# EAGLE board Computer Power Relay - Controller (EAGLE 9.6.2)
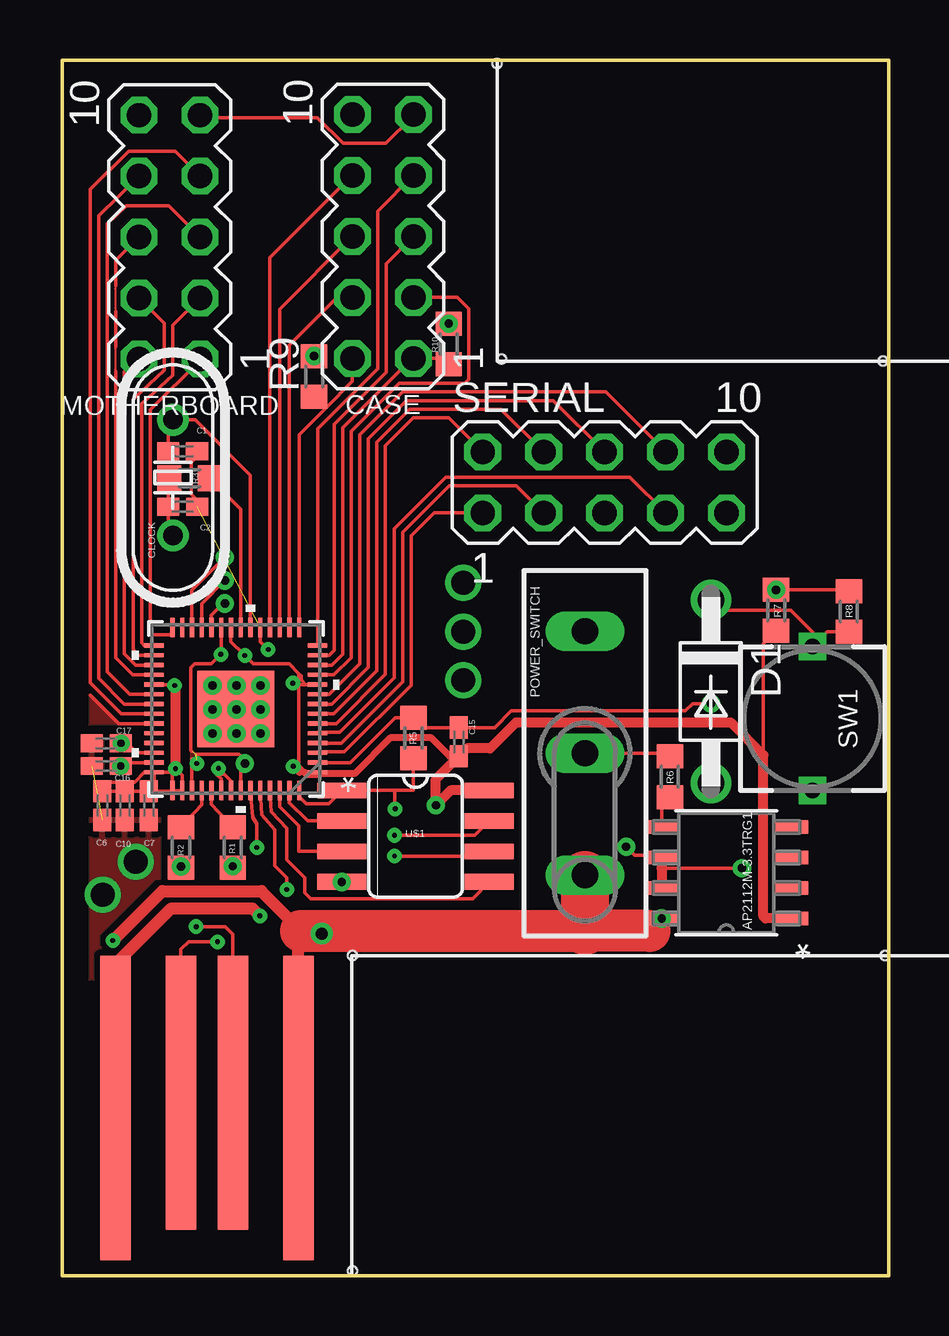
[diagram p0: board, top side]
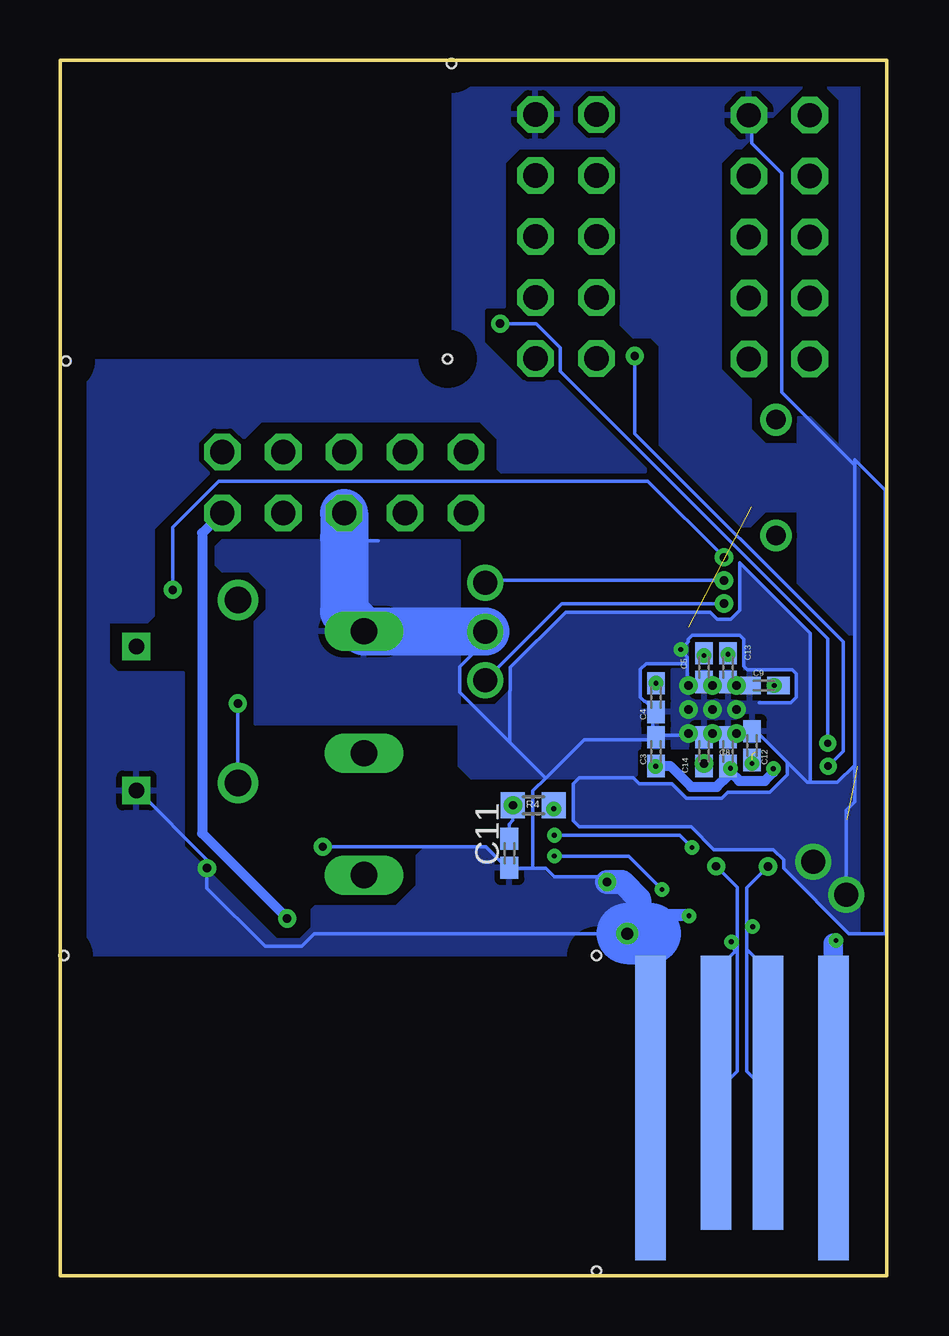
[diagram p1: board, bottom side, seen from below]

Size 34.45 x 50.65 mm. Coordinates in mm from the lower left corner, seen from the top.
Outline: 0,0 12.06,0 34.45,0 34.45,50.65 0,50.65 0,0
Copper layers (1*16): Top 0.035mm / dielectric 1.5mm / Bottom 0.035mm
Design rules "default": minimum track width 6mil, minimum drill 0.35mm, track to track 6mil, track to pad 6mil, pad to pad 6mil, via to via 6mil, smd to smd 6mil, copper to edge 40mil, drill to drill 6mil, minimum pad ring 10mil, minimum via ring 8mil, stop-mask expansion 4mil, vias tented up to drill 0mil, thermal gap 10mil
Net classes: 0 default: clearance 0.205 mm
Holes 0.38 mm at 18.3,38.2 18.13,50.5 34.2,38.1 34.29,13.34 12.1,13.34 12.1,0.2

## Footprints (pad centres in the part's own frame; a part is rotated, then mirrored left to right if it is on the bottom)
C0402K = smd 0.925 x 0.74: 1 -0.6,0; 2 0.6,0
MA05-2 = drill 1.016 octagon: 1 -5.08,-1.27; 2 -5.08,1.27; 3 -2.54,-1.27; 4 -2.54,1.27; 5 0,-1.27; 6 0,1.27; 7 2.54,-1.27; 8 2.54,1.27; 9 5.08,-1.27; 10 5.08,1.27
HC49/S = drill 0.813: 1 -2.413,0; 2 2.413,0
DO41-10 = drill 1.118: A 3.81,0; C -3.81,0
SWITCH-SLIDE-2P2T = drill 1.1 pad 1.422 long: 1 -5.08,0; 2 0,0; 3 5.08,0
R0603 = smd 1 x 1.1: 1 -0.85,0; 2 0.85,0
PUSHBUTTON_TH = drill 0.65 square: P$1 3,0; P$2 -3,0
IC57_RP2040 = smd 0.813 x 0.178: 1 -3.404,2.642; 2 -3.404,2.235; 3 -3.404,1.829; 4 -3.404,1.422; 5 -3.404,1.016; 6 -3.404,0.61; 7 -3.404,0.203; 8 -3.404,-0.203; 9 -3.404,-0.61; 10 -3.404,-1.016; 11 -3.404,-1.422; 12 -3.404,-1.829; 13 -3.404,-2.235; 14 -3.404,-2.642; 29 3.404,-2.642; 30 3.404,-2.235; 31 3.404,-1.829; 32 3.404,-1.422; 33 3.404,-1.016; 34 3.404,-0.61; 35 3.404,-0.203; 36 3.404,0.203; 37 3.404,0.61; 38 3.404,1.016; 39 3.404,1.422; 40 3.404,1.829; 41 3.404,2.235; 42 3.404,2.642 | smd 0.178 x 0.813: 15 -2.642,-3.404; 16 -2.235,-3.404; 17 -1.829,-3.404; 18 -1.422,-3.404; 19 -1.016,-3.404; 20 -0.61,-3.404; 21 -0.203,-3.404; 22 0.203,-3.404; 23 0.61,-3.404; 24 1.016,-3.404; 25 1.422,-3.404; 26 1.829,-3.404; 27 2.235,-3.404; 28 2.642,-3.404; 43 2.642,3.404; 44 2.235,3.404; 45 1.829,3.404; 46 1.422,3.404; 47 1.016,3.404; 48 0.61,3.404; 49 0.203,3.404; 50 -0.203,3.404; 51 -0.61,3.404; 52 -1.016,3.404; 53 -1.422,3.404; 54 -1.829,3.404; 55 -2.235,3.404; 56 -2.642,3.404 | smd 3.2 x 3.2: 57 0,0
AP2112M-3.3TRG1_DIO = smd 1.422 x 0.559: 1 -2.692,1.905; 2 -2.692,0.635; 3 -2.692,-0.635; 4 -2.692,-1.905; 5 2.692,-1.905; 6 2.692,-0.635; 7 2.692,0.635; 8 2.692,1.905
SO08 = smd 0.66 x 2.032: 1 -1.905,-3.073; 2 -0.635,-3.073; 3 0.635,-3.073; 4 1.905,-3.073; 5 1.905,3.073; 6 0.635,3.073; 7 -0.635,3.073; 8 -1.905,3.073
PCB_USB = smd 1.27 x 12.7: 5V -3.81,6.35; GND 3.81,6.35 | smd 1.27 x 12.7 bottom: 5V_2 3.81,6.35; GND_2 -3.81,6.35 | smd 1.27 x 11.43: D+ 1.079,5.715; D- -1.079,5.715 | smd 1.27 x 11.43 bottom: D+_2 -1.079,5.715; D-_2 1.079,5.715

## Placement (x,y rotation side)
C1  ~30pF  [C0402K]  5.03,34.35 180 top
C2  ~30pF  [C0402K]  5.03,32.03 180 top
C3  100nF  [C0402K]  9.62,21.84 270 bottom
C4  100nF  [C0402K]  9.62,24.09 90 bottom
C5  100nF  [C0402K]  7.62,25.34 90 bottom
C6  100nF  [C0402K]  1.68,19.59 90 top
C7  1uF  [C0402K]  3.62,19.59 90 top
C8  100nF  [C0402K]  6.62,21.84 270 bottom
C9  100nF  [C0402K]  5.12,24.59 0 bottom
C10  100nF  [C0402K]  2.62,19.59 90 top
C11  100nF  [C0402K]  15.73,17.6 90 bottom
C12  1uF  [C0402K]  5.62,22.09 270 bottom
C13  100nF  [C0402K]  6.62,25.34 90 bottom
C14  100nF  [C0402K]  7.62,21.84 270 bottom
C15  100nF  [C0402K]  16.53,22.24 270 top
C16  100nF  [C0402K]  1.84,21.23 180 top
C17  100nF  [C0402K]  1.84,22.18 180 top
CASE  [MA05-2]  13.37,43.3 90 top
CLOCK  12MHz  [HC49/S]  4.62,33.25 270 top
D1  1N4004  [DO41-10]  27.03,24.34 270 top
MOTHERBOARD  [MA05-2]  4.48,43.27 90 top
POWER_SWITCH  SWITCH-SLIDE-2P2T  [SWITCH-SLIDE-2P2T]  21.79,21.77 90 top
R1  27.4 Ω  [R0603]  7.11,17.84 270 top
R2  27.4 Ω  [R0603]  4.95,17.84 270 top
R3  1k Ω  [R0603]  5.31,33.23 0 top
R4  10k Ω  [R0603]  14.73,19.6 180 bottom
R5  1k Ω  [R0603]  14.64,22.4 90 top
R6  10k Ω  [R0603]  25.33,20.78 270 top
R7  10k Ω  [R0603]  29.75,27.72 270 top
R8  4.7k Ω  [R0603]  32.79,27.67 90 top
R9  27.4 Ω  [R0603]  10.5,37.47 90 top
R10  27.4 Ω  [R0603]  16.11,38.82 90 top
SERIAL  [MA05-2]  22.61,33.05 0 top
SW1  [PUSHBUTTON_TH]  31.27,23.21 90 top
U1  RP2040  [IC57_RP2040]  7.24,23.61 180 top
U2  AP2112M-3.3TRG1  [AP2112M-3.3TRG1_DIO]  27.68,16.78 180 top
U$1  W25Q128JVSIM-ND__QSPI-FLASH  [SO08]  14.73,18.31 270 top
U$2  PCB_USB  [PCB_USB]  6.03,13.34 180 top

## Library data of the parts
C1-C17 = adafruit
CASE MOTHERBOARD SERIAL = con-lstb; OC_FARNELL: unknown; OC_NEWARK: unknown
CLOCK = crystal; OC_FARNELL: 1667008; OC_NEWARK: unknown
D1 SW1 U$1 U$2 = KVM Keyboard
POWER_SWITCH = Inventory
R1-R10 = rcl; SPICEPREFIX: R
U1 = KVM Keyboard; COPYRIGHT: Copyright (C) 2022 Ultra Librarian. All rights reserved.; DIGI-KEY_PART_NUMBER_1: 2648-SC0908(7)TR-ND; DIGI-KEY_PART_NUMBER_2: 2648-SC0908(7)CT-ND; DIGI-KEY_PART_NUMBER_3: 2648-SC0908(7)DKR-ND; MANUFACTURER_PART_NUMBER: SC0908(7); MFR_NAME: Raspberry Pi
U2 = KVM Keyboard; COPYRIGHT: Copyright (C) 2022 Ultra Librarian. All rights reserved.; DIGI-KEY_PART_NUMBER_1: AP2112M-3.3TRG1DITR-ND; DIGI-KEY_PART_NUMBER_2: AP2112M-3.3TRG1DICT-ND; DIGI-KEY_PART_NUMBER_3: AP2112M-3.3TRG1DIDKR-ND; MANUFACTURER_PART_NUMBER: AP2112M-3.3TRG1; MFR_NAME: Diodes Inc

## Nets
1V1: C12.2 C13.2 C14.2 U1.23 U1.45 U1.50
3V3: C3.2 C4.2 C5.2 C6.2 C7.2 C8.2 C9.2 C10.2 C11.2 C15.2 R4.2 R7.2 U1.1 U1.10 U1.22 U1.33 U1.42 U1.43 U1.44 U1.48 U1.49 U2.1 U$1.8
5V: POWER_SWITCH.1 SERIAL.9 U2.8 U$2.5V U$2.5V_2
BOOTSEL: C15.1 D1.A R5.2 U1.2
BUTTON: D1.C R8.1 SW1.P$1
CASE-1: CASE.1 R10.1 U1.12
CASE-2: CASE.2 R9.1 U1.15
CASE-3: CASE.3 U1.11
CASE-4: CASE.4 U1.16
CASE-5: CASE.5 U1.13
CASE-6: CASE.6 U1.17
CASE-7: CASE.7 U1.14
CASE-8: CASE.8 U1.18
CTS: SERIAL.8 U1.9
D+: R1.2 U$2.D+ U$2.D+_2
D-: R2.2 U$2.D- U$2.D-_2
DBG-CLK: U1.24
DBG-DIO: U1.25
DCD: SERIAL.1 U1.3
DSR: SERIAL.6 U1.8
EN: R6.2 U2.5
GND: C1.1 C2.1 C3.1 C4.1 C5.1 C6.1 C7.1 C8.1 C9.1 C10.1 C11.1 C12.1 C13.1 C14.1 C16.2 C17.2 CASE.9 MOTHERBOARD.9 POWER_SWITCH.3 SERIAL.5 SW1.P$2 U1.19 U1.57 U2.6 U2.7 U$1.4 U$2.GND U$2.GND_2
GPIO16: U1.27
GPIO25: U1.37
GPIO26: U1.38
GPIO27: U1.39
MB-1: MOTHERBOARD.1 U1.28
MB-2: MOTHERBOARD.2 U1.31
MB-3: MOTHERBOARD.3 U1.29
MB-4: MOTHERBOARD.4 U1.30
MB-5: MOTHERBOARD.5 U1.34
MB-6: MOTHERBOARD.6 U1.32
MB-7: MOTHERBOARD.7 U1.36
MB-8: MOTHERBOARD.8 U1.35
N$1: R1.1 U1.47
N$2: R2.1 U1.46
N$3: C2.2 CLOCK.2 R3.1
N$4: R3.2 U1.21
N$5: C1.2 CLOCK.1 U1.20
N$16: U1.54 U$1.3
N$17: U1.55 U$1.2
N$18: U1.53 U$1.5
N$19: U1.52 U$1.6
N$20: U1.51 U$1.7
PWM0: C17.1 R10.2 U1.40
PWM1: C16.1 R9.2 U1.41
QSPI_SS_N: R4.1 R5.1 U1.56 U$1.1
RTS: SERIAL.7 U1.5
RUN: R7.1 R8.2 U1.26
RXD: SERIAL.2 U1.6
SE4: SERIAL.4 U1.7
SWITCH: POWER_SWITCH.2 R6.1
TXD: SERIAL.3 U1.4

## Tracks (layer width: path | path; a pad name or v marks a point on that pad's centre or on a via)
1V1  (via drill 0.2, 0.35)  (2 unrouted)
  Top 0.152: U1.50 7.44,21.16 | 7.44,21.16 7.44,21.65 7.37,21.73 5.6,21.73 | 5.41,21.84 5.36,21.89 5.36,25.33 5.52,25.49 6.22,25.49 v6.62,25.89 C13.2 U1.23 6.62,27.03 | 5.37,20.17 U1.45 5.41,21.54 v5.62,21.34 | v7.62,21.34 7.44,21.16
  Bottom 0.152: C14.2 v7.62,21.34 | C12.2 v5.62,21.34 | C13.2 6.7,25.91 v6.62,25.89
  pour Top: 5.6,21.73 5.41,21.54 5.41,21.84 5.52,21.73
3V3  (via drill 0.2, 0.35)
  Top 0.152: 6.43,20.89 6.63,20.69 U1.48 | 6.43,20.89 6.76,20.89 7.04,20.62 U1.49 7.04,20.55 | v6.51,21.14 6.35,20.97 6.43,20.89 | v4.73,21.12 5,20.85 U1.44 U1.43 | v4.73,21.12 4.6,20.99 U1.43 | v4.73,21.12 4.57,20.97 U1.42 | v7.62,25.84 7.96,25.49 9.46,25.49 9.87,25.09 | v7.62,25.84 7.57,25.88 | 7.57,25.88 7.04,26.41 U1.22 | 9.96,25 9.96,24.83 10.16,24.63 U1.10 9.67,24.63 v9.62,24.68 | 9.87,25.09 9.96,25 | 9.96,25 9.87,24.91 | 9.87,24.91 9.87,21.26 10.16,20.97 U1.1 10.69,20.92 10.68,20.92 10.64,20.88 | 9.87,24.91 9.87,25.09 | U1.43 4.58,20.18 C7.2 | C7.2 C10.2 | C10.2 2.67,20.18 | C10.2 C6.2 2.05,20.56 3.02,20.56 3.43,20.97 U1.42 | C7.2 3.83,20.41 U1.42 | U1.33 4.65,24.63 v4.69,24.59 4.73,24.55 | U$1.8 17.99,20.21 | R7.2 29.22,26.34 29.22,21.68 | 30.25,14.88 U2.1 | v7.62,25.84 7.6,25.91 7.57,25.88
  Top 0.241: 10.16,20.97 9.88,20.97
  Top 0.29: 10.64,20.88 10.2,20.88 10.14,20.94 | 9.88,20.97 v9.63,21.22 | 16.5,21.64 C15.2 16.15,21.64 15.38,22.4 13.68,22.4 12.19,20.92 10.69,20.92
  Top 0.406: v4.73,21.12 4.73,24.55 | U$1.8 16.19,20.21 R4.2 15.58,20.68 C15.2 16.86,21.97 17.83,21.97 18.92,23.05 27.85,23.05 29.22,21.68 29.22,14.97 29.31,14.88 U2.1
  Bottom 0.152: C3.2 v9.63,21.22 | C11.2 15.73,18.81 15.58,18.96 R4.2 15.68,19.5 | v4.69,24.59 4.56,24.66 C9.2 | C5.2 7.78,25.91 v7.62,25.84
  Bottom 0.406: C3.2 9.03,21.23 8.15,20.36 7.08,20.36 6.62,20.82 C8.2 v6.51,21.14 6.51,20.98 6.15,20.61 5.08,20.61 4.72,20.97 v4.72,21.12 v4.73,21.12
  other vias: 15.58,19.6
5V  (via drill 0.2, 0.35)
  Top 0.406: U2.8 24.47,14.37
  Top 0.508: U$2.5V 9.84,14.48 | 9.96,14.37 9.84,14.48 | 9.84,14.48 8.3,16.02 4.18,16.02 v2.12,13.96
  Top 1.75: 9.96,14.37 21.79,14.37 24.47,14.37
  Top 2: POWER_SWITCH.1 21.79,14.37
  Bottom 0.406: SERIAL.9 28.53,30.94 28.53,18.43 U2.8
  Bottom 0.508: v2.12,13.96 2.22,13.85
  Bottom 0.813: U$2.5V_2 2.22,13.85
  other vias: 24.99,14.88
BOOTSEL  (via drill 0.35)
  Top 0.152: U1.2 12,21.38 13.88,23.25 R5.2 15.06,22.84 C15.1 18.02,22.84 18.72,23.53 25.97,23.53 26.28,23.84 v27.04,23.84
  Bottom 0.152: v27.04,23.84 D1.A
BUTTON
  Top 0.152: R8.1 31.88,26.82 SW1.P$1 31.27,26.8 30.36,27.71 27.47,27.71 D1.C
CASE-1
  Top 0.152: U1.12 11.23,25.44 11.69,25.9 11.69,35.32 14.59,38.22 CASE.1 15.86,38.22 R10.1
CASE-2
  Top 0.152: U1.15 9.88,35.04 11,36.16 | CASE.2 12.1,37.26 11,36.16 | R9.1 10.96,36.16 11,36.16
CASE-3
  Top 0.152: U1.11 11.33,25.03 12.04,25.75 12.04,35.17 14.05,37.18 16.77,37.18 16.95,37.35 16.95,40.28 16.46,40.76 CASE.3
CASE-4
  Top 0.152: U1.16 9.47,38.76 11.47,40.76 CASE.4
CASE-5
  Top 0.152: U1.13 11.13,25.84 11.33,26.05 11.33,35.47 13.5,37.64 13.5,42.16 CASE.5
CASE-6
  Top 0.152: U1.17 9.07,40.27 CASE.6
CASE-7
  Top 0.152: U1.14 10.64,35.29 13.14,37.79 13.14,44.34 CASE.7
CASE-8
  Top 0.152: U1.18 8.66,42.4 CASE.8
CTS
  Top 0.152: U1.9 11.13,24.22 12.4,25.49 12.4,35.02 14.2,36.82 22.65,36.82 SERIAL.8
D+  (via drill 0.2, 0.35)
  Top 0.152: v6.48,13.91 5.27,13.91 4.95,13.59 U$2.D+ | v7.11,17.06 7.24,17.16 R1.2
  Bottom 0.152: v7.12,17.05 7.05,16.99 | 7.05,16.99 6.23,16.17 6.23,13.59 6.24,13.59 | U$2.D+_2 6.24,8.51 6.24,13.59 | 6.24,13.59 6.29,13.53 | 6.29,13.53 6.62,13.21 | v7.11,17.06 7.06,16.98 7.05,16.99 | 6.29,13.53 6.35,13.58 6.35,13.76 v6.48,13.91
D-  (via drill 0.2, 0.35)
  Top 0.152: v5.59,14.54 6.79,14.54 7.11,14.22 U$2.D- | v4.95,17.04 5.1,16.98 R2.2
  Bottom 0.152: v4.95,17.04 5.05,16.94 | 5.05,16.94 5.83,16.16 5.83,14.65 | U$2.D-_2 5.83,8.51 5.83,13.59 | 5.83,14.65 5.83,13.59 | 5.83,13.59 5.32,13.08 | v4.95,17.04 5.1,16.98 5.05,16.94 | 5.83,14.65 5.81,14.65 5.63,14.65 v5.59,14.54
DBG-CLK  (via drill 0.35, 1)
  Top 0.152: U1.24 6.22,27.52 6.7,28 v6.78,28
  Bottom 0.152: v6.78,28 13.53,28 v16.73,24.81
DBG-DIO  (via drill 0.35, 1)
  Top 0.152: U1.25 5.82,28 v6.78,28.96
  Bottom 0.152: v6.78,28.96 16.64,28.96 v16.73,28.88
DCD
  Top 0.152: U1.3 10.68,21.82 11.76,21.82 14.55,24.61 14.55,30.82 15.5,31.78 SERIAL.1
DSR
  Top 0.152: SERIAL.6 20.46,36.46 14.35,36.46 12.76,34.88 12.76,25.34 11.23,23.81 U1.8
EN
  Top 0.152: U2.5 24.98,19.59 R6.2
GND  (via drill 0.2, 0.35, 0.5, 1)  (2 unrouted)
  Top 0.152: U1.19 8.26,26.41 v8.58,26.09 | C2.1 5.63,32.31 5.38,32.56 5.38,33.89 5.62,34.14 C1.1 | U$2.GND 2.22,12.38 | MOTHERBOARD.9 5.81,48.25 10.63,48.25 11.71,47.18 13.49,47.18 14.57,48.25 CASE.9 | 16.89,26.8 v16.73,26.84 | v28.33,16.98 24.98,16.98 | v7.26,23.59 7.24,23.59 U1.57 7.06,23.59 6.35,23.59 v6.26,23.59 6.35,23.41 6.35,22.7 v6.26,22.59 | v8.27,23.59 8.13,23.59 7.42,23.59 v7.26,23.59 | v7.26,24.59 7.24,24.48 7.24,23.77 v7.26,23.59 | 1.32,21.3 1.34,21.27 C16.2 | v23.5,17.87 23.86,17.51 24.93,17.51 U2.6
  Top 0.406: U2.6 24.98,16.98 U2.7
  Top 0.508: v8.24,14.99 7.93,15.3 4.55,15.3 2.22,12.97
  Bottom 0.152: 8.37,24.68 v8.27,24.59 | SW1.P$2 31.19,20.19 28.33,17.33 v28.33,16.98 28.33,16.14 25.91,13.72 24.38,13.72 23.85,14.25 v10.81,14.25 | C3.1 9.74,22.52 9.74,23.41 C4.1 10.07,23.94 10.1,23.94 10.27,24.11 10.27,25.26 10.03,25.5 8.31,25.5 | C3.1 9.56,22.52 8.31,22.52 v8.27,22.59 8.13,22.52 7.78,22.52 C14.1 7.6,22.52 7.42,22.52 v7.26,22.59 7.24,22.52 6.7,22.52 C8.1 6.53,22.52 6.35,22.52 v6.26,22.59 6.17,22.7 5.63,22.7 C12.1 5.45,22.7 4.16,21.4 | v8.27,24.59 8.13,24.66 7.78,24.66 C5.1 7.6,24.66 7.42,24.66 v7.26,24.59 7.24,24.66 6.7,24.66 C13.1 6.53,24.66 6.35,24.66 v6.26,24.59 6.17,24.66 5.81,24.66 C9.1 | 8.31,25.5 8.31,24.66 v8.27,24.59 | 8.31,25.5 8.31,25.76 v8.58,26.09 8.27,26.4 8.27,26.51 8.1,26.68 6.13,26.68 5.96,26.51 5.96,25.4 5.82,25.25 3.95,25.25 3.77,25.07 3.77,24.1 4,23.88 5.32,23.88 | 14.74,16.98 14.21,16.98 13.85,16.62 | 14.74,16.98 15.64,16.98 C11.1 15.82,16.98 16.71,17.87 v23.5,17.87 | 13.85,16.62 12.06,16.62 U$1.4 | 14.21,20.73 14.74,20.19 14.74,16.98 | 14.21,20.73 12.6,22.34 9.74,22.34 C3.1 | 14.21,20.73 15.71,22.23 | 15.71,22.23 17.78,24.3 17.78,25.38 16.89,26.27 16.89,26.8 v16.73,26.84 | 1.34,33.77 4.38,36.81 4.38,45.93 5.63,47.18 5.63,48.25 MOTHERBOARD.9 | 1.34,33.77 1.34,34 0.07,32.72 0.07,14.25 1.58,14.25 4.29,16.96 4.29,17.32 4.73,17.75 7.2,17.75 8.16,18.7 12.81,18.7 13.06,18.95 13.06,20.5 12.81,20.75 10.56,20.75 10.31,20.49 8.97,20.49 8.36,19.88 6.88,19.88 6.62,20.13 4.88,20.13 4.14,20.86 4.14,21.36 4.16,21.38 4.16,21.4 | 1.34,21.27 1.34,33.77 | 1.34,21.27 2.06,20.55 3.19,20.55 | 3.19,20.55 3.31,20.55 4.16,21.4 | 22.61,30.75 22.48,30.62 21.19,30.62
  Bottom 0.152: 15.71,22.23 15.71,24.37 15.69,24.39 15.69,25.34 13.39,27.65 7.36,27.65 7.06,27.34 6.51,27.34 6.12,27.73 6.12,29.69 3.19,26.76 3.19,20.55 | 13.85,16.62 13.86,16.62 | 1.34,21.27 1.34,19.74 1.69,19.39 v1.69,15.88
  Bottom 0.508: v8.24,14.99 8.27,15.02 9.3,15.02 9.84,14.48 9.84,7.5 U$2.GND_2
  Bottom 1: 9.84,14.25 9.84,7.5 | v10.81,14.25 10.31,14.75 10.31,15.69 11.03,16.4 U$1.4
  Bottom 2: SERIAL.5 22.61,30.75 22.61,27.67 POWER_SWITCH.3 v16.73,26.85 v16.73,26.84
  Bottom 2.54: v10.81,14.25 9.84,14.25
  other vias: 11.65,16.4 3.06,17.25
  pour Top: -0.06,22.5 -0.06,12.38 2.22,12.38 2.22,13.03 1.53,13.72 1.53,14.2 3.89,16.56 4.07,16.56 4.07,19.38 0.94,19.38 0.94,21 1.69,21 1.69,22.5
  pour Bottom: 26.32,23 17.82,23 17.82,30.62 27.69,30.62 27.94,30.38 27.94,29.62 27.69,29.38 26.57,29.38 25.82,28.62 25.82,27.75 26.32,27.25
  pour Bottom: 5.32,25.25 8.94,25.25 8.94,23.88 9.94,23.88 9.94,22 6.32,22 6.32,22.25 5.32,22.25
  pour Bottom: 5.32,23.88 5.32,22.62 3.31,20.62 3.19,20.62 3.19,26.75 6.07,29.62 6.07,27.75 6.57,27.25 7.07,27.25 7.44,27.62 13.31,27.62 15.69,25.25 15.69,24.38 16.32,23.75 17.82,23.75 17.82,21.25 17.32,20.75 10.56,20.75 10.44,20.88 10.44,21.88 10.31,22 9.94,22 9.94,23.62 10.31,24 10.31,25.25 10.06,25.5 8.31,25.5 8.31,26.5 8.06,26.75 6.19,26.75 5.94,26.5 5.94,25.38 5.82,25.25 3.94,25.25 3.69,25 3.69,24.12 4.07,23.75 5.19,23.75
  pour Bottom: 10.56,20.75 12.81,20.75 13.06,20.5 13.06,19 12.81,18.75 8.19,18.75 7.19,17.75 4.69,17.75 4.19,17.25 4.19,17 1.56,14.38 0.07,14.38 0.07,32.5 1.31,33.75 1.31,21.25 2.06,20.5 3.31,20.5 4.07,21.25 4.07,20.88 4.82,20.12 6.57,20.12 6.82,19.88 8.31,19.88 8.94,20.5 10.31,20.5
  pour Bottom: 1.31,33.88 3.19,35.75 3.69,35.75 3.69,28.88 1.56,26.75 1.31,26.75
  pour Bottom: 10.81,14.25 11.69,13.38 34.44,13.38 34.44,38.12 18.07,38.12 18.07,50.62 0.07,50.62 0.07,32.75 1.94,34.62 1.94,49 2.56,49.62 3.44,49.62 6.07,47 6.32,47 6.94,46.38 6.94,37.75 5.69,36.5 5.69,35.25 5.07,34.62 3.81,34.62 3.81,31.88 5.07,31.88 5.69,31.25 6.07,31.25 9.44,34.62 9.44,38.75 9.81,39.12 10.56,39.12 11.06,39.62 11.06,46.38 11.69,47 15.31,47 15.94,46.38 15.94,40.38 16.69,40.38 16.82,40.25 16.82,38.88 15.19,37.25 13.69,37.25 10.06,33.62 10.06,33.5 16.07,33.5 16.19,33.62 16.19,34.88 16.94,35.62 26.07,35.62 30.57,31.13 30.57,27.5 30.81,27.25 32.44,27.25 32.44,25.5 32.06,25.12 29.32,25.12 29.32,17.88 25.44,14 24.44,14 23.94,14.5 23.94,15.25 23.82,15.37 20.44,15.37 19.57,16.25 19.57,17.5 19.19,17.88 16.69,17.88 15.69,16.88 14.31,16.88 13.94,16.5 11.06,16.5 10.81,16.25
GPIO25
  Top 0.152: U1.37 2.36,23 1.17,24.19
  pour Top: 1.19,24.19 0.01,24.19 0.01,23 2.38,23
MB-1
  Top 0.152: MOTHERBOARD.1 5.75,38.14 3.67,36.07 3.67,26.8 3.78,26.69 4.48,26.69 4.6,26.81 U1.28
MB-2
  Top 0.152: MOTHERBOARD.2 2.6,37.66 2.6,25.91 3.07,25.44 U1.31
MB-3
  Top 0.152: MOTHERBOARD.3 4.61,39.59 4.61,37.52 3.31,36.34 3.31,26.37 3.43,26.25 U1.29
MB-4
  Top 0.152: MOTHERBOARD.4 4.25,39.69 4.25,37.72 2.96,36.52 2.96,26.09 3.2,25.84 U1.30
MB-5
  Top 0.152: MOTHERBOARD.5 4.44,44.58 2.67,44.58 1.88,43.84 1.88,25.16 2.82,24.22 U1.34
MB-6
  Top 0.076: 2.24,41.25 2.21,41.12 | 2.21,40.31 2.24,40.19
  Top 0.079: 2.21,41.12 2.21,40.31 | 2.24,38.7 2.21,38.62 2.21,37.75 2.24,37.68
  Top 0.152: 2.24,37.68 2.24,25.74 2.95,25.03 U1.32 | 2.24,38.7 2.24,40.19 | 2.24,41.25 2.24,42.3 MOTHERBOARD.6
MB-7
  Top 0.152: MOTHERBOARD.7 4.71,46.85 2.77,46.85 1.17,45.26 1.17,24.7 2.46,23.41 U1.36
MB-8
  Top 0.152: MOTHERBOARD.8 1.53,44.15 1.53,24.88 2.59,23.81 U1.35
N$1
  Top 0.152: U1.47 6.22,19.63 R1.1
N$2
  Top 0.152: U1.46 5.82,19.61 R2.1
N$3
  Top 0.152: CLOCK.2 4.43,31.03 C2.2 4.43,33.2 R3.1
N$4
  Top 0.152: 7.44,27.5 U1.21 7.44,31.94 R3.2
N$5
  Top 0.152: CLOCK.1 5.54,35.66 7.85,33.36 U1.20 | CLOCK.1 | CLOCK.1 4.42,35.47 C1.2
N$16
  Top 0.152: U$1.3 9.87,17.67 9.87,18.73 9.07,19.53 U1.54
N$17
  Top 0.152: U$1.2 10.24,18.94 9.47,19.71 U1.55
N$18
  Top 0.152: U$1.5 17.11,15.71 10.37,15.71 10.12,15.96 10.12,16.59 9.37,17.34 9.37,18.63 8.71,19.34 U1.53
N$19  (via drill 0.2)
  Top 0.152: U$1.6 17.61,17.48 v13.85,17.48 | v9.37,16.09 9.37,16.59 8.87,17.09 8.87,18.59 8.31,19.2 U1.52
  Bottom 0.152: v13.85,17.48 10.76,17.48 v9.37,16.09
N$20  (via drill 0.2)
  Top 0.152: U$1.7 17.2,18.35 v13.85,18.35 | U1.51 7.95,19.1 8.12,18.84 v8.12,17.84
  Bottom 0.152: v8.12,17.84 8.63,18.35 v13.85,18.35
PWM0  (via drill 0.3, 0.35)
  Top 0.152: U1.40 3.12,21.78 2.72,22.18 v2.46,22.18 2.42,22.16 C17.1
  Bottom 0.152: v2.46,22.18 2.46,26.53 13.6,37.67 13.6,38.65 14.61,39.67 R10.2
  other vias: 16.11,39.67
PWM1  (via drill 0.3, 0.35)
  Top 0.152: U1.41 2.59,21.38 v2.45,21.23 2.42,21.27 C16.1
  Bottom 0.152: v2.45,21.23 1.82,21.85 1.82,26.41 10.5,35.09 R9.2
  other vias: 10.5,38.32
QSPI_SS_N  (via drill 0.2)
  Top 0.152: 13.85,20.21 14.64,20.21 R5.1 | 13.85,20.21 U$1.1 11.1,19.66 10.17,19.66 9.88,19.96 U1.56 | 13.85,20.21 13.85,19.48 v13.88,19.45
  Bottom 0.152: R4.1 v13.88,19.45
RTS
  Top 0.152: U1.5 10.68,22.63 11.56,22.63 13.83,24.9 13.83,31.12 15.99,33.27 23.65,33.27 SERIAL.7
RUN  (via drill 0.35)
  Top 0.152: R7.1 32.74,28.57 R8.2 | U1.26 5.41,28.55 v6.78,29.93
  Bottom 0.152: v6.78,29.93 9.96,33.1 27.84,33.1 29.75,31.19 R7.1
  other vias: 29.75,28.57
RXD
  Top 0.152: SERIAL.2 16.1,35.74 14.64,35.74 13.47,34.58 13.47,25.05 11.43,23 U1.6
SE4
  Top 0.152: U1.7 11.33,23.41 13.12,25.2 13.12,34.73 14.49,36.1 18.29,36.1 SERIAL.4
SWITCH
  Top 0.152: R6.1 25.19,21.77 POWER_SWITCH.2
TXD
  Top 0.152: U1.4 11.62,22.19 14.19,24.75 14.19,30.97 16.14,32.92 18.93,32.92 SERIAL.3

## Text on the board
tValues: PWR SWITCH / + - | - + / RESET SWITCH | PWR SWITCH / + - | - + / RESET SWITCH | PWR LED / + - | PWR LED / + - | + - / HDD LED | + - / HDD LED